# EAGLE board induction heater (EAGLE 9.6.2)
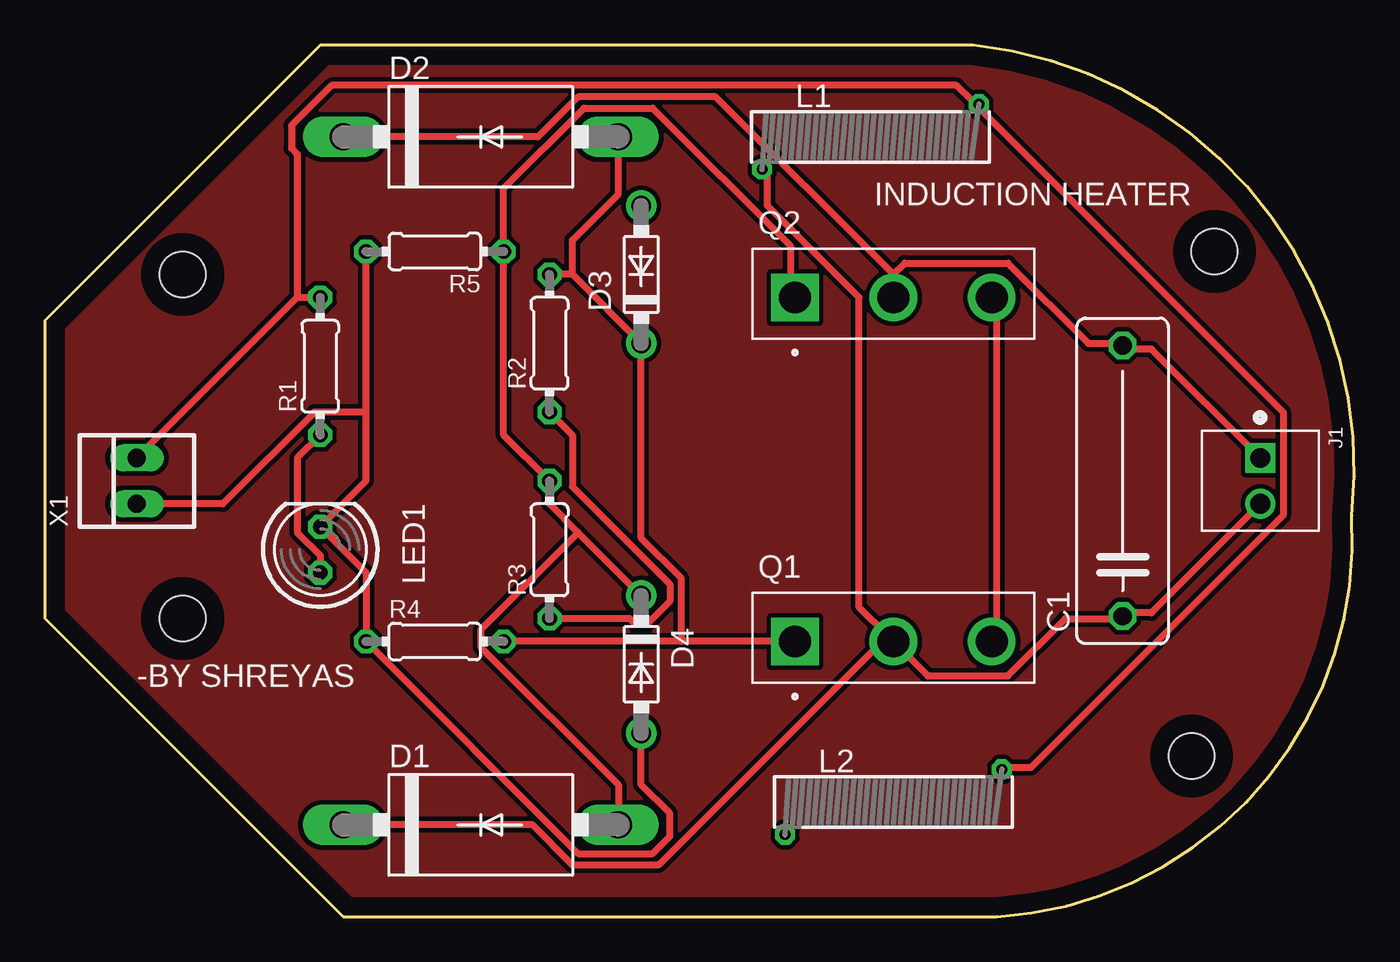
[diagram p0: board, top side]
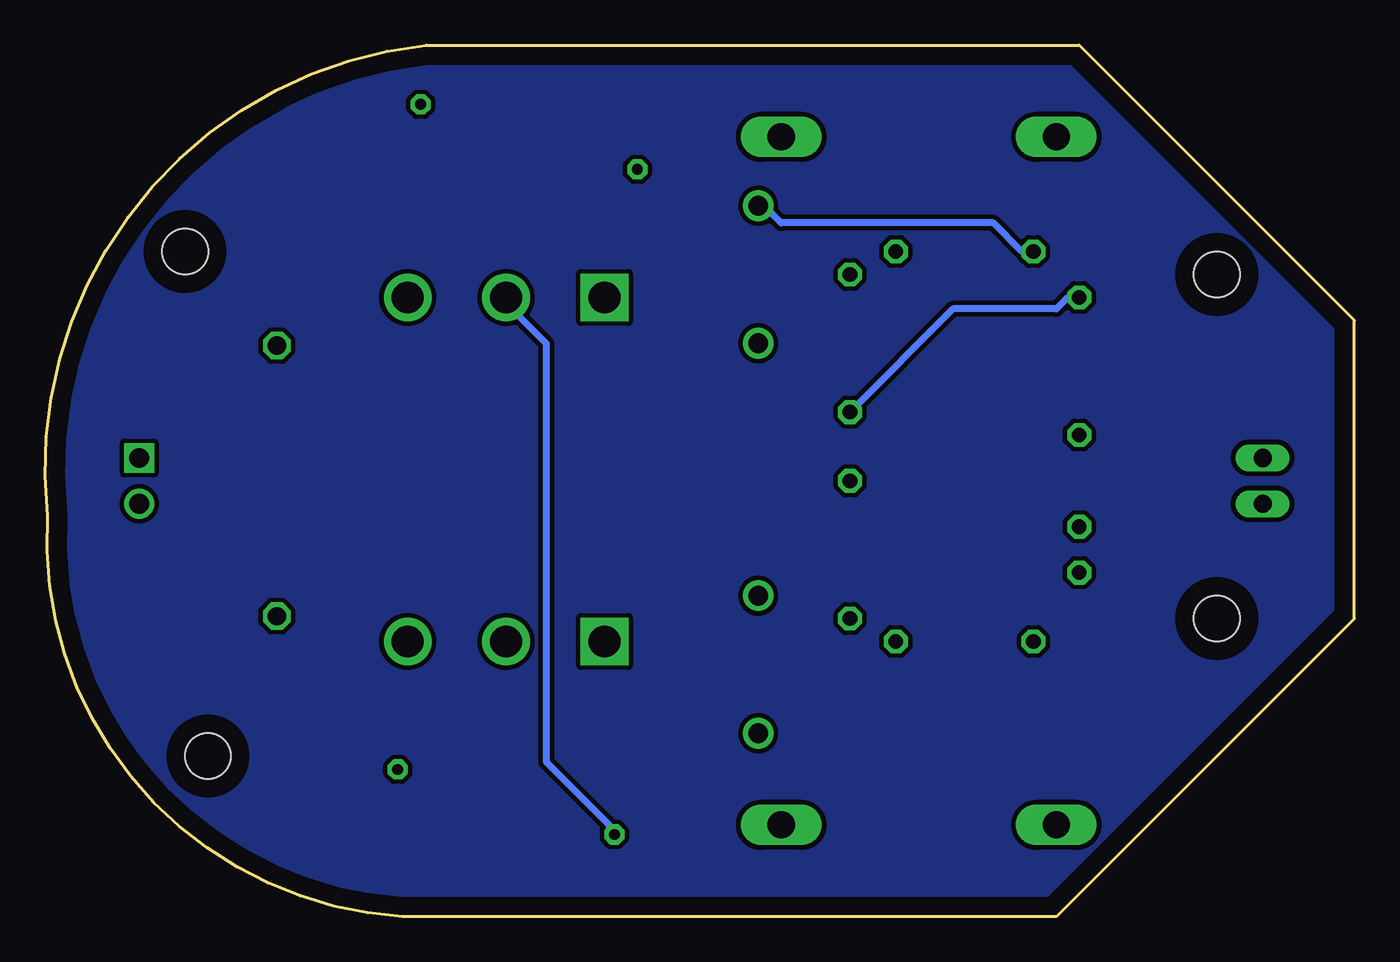
[diagram p1: board, bottom side, seen from below]

Size 72.52 x 48.26 mm. Coordinates in mm from the lower left corner, seen from the top.
Outline: 0,16.51 0,33.02 15.24,48.26 51.41,48.26 arc-90 72.39,22.2 arc-90 52.73,0 16.51,0 0,16.51
Copper layers (1*16): Top 0.035mm / dielectric 1.5mm / Bottom 0.035mm
Design rules "default": minimum track width 6mil, minimum drill 0.35mm, track to track 6mil, track to pad 6mil, pad to pad 6mil, via to via 6mil, smd to smd 6mil, copper to edge 40mil, drill to drill 6mil, minimum pad ring 10mil, minimum via ring 8mil, stop-mask expansion 4mil, vias tented up to drill 0mil, thermal gap 10mil
Net classes: 0 default: width 0.381 mm, drill 0.508 mm, clearance 0.254 mm
Holes 2.54 mm at 7.62,35.56 63.5,8.89 7.62,16.51 64.77,36.83

## Footprints (pad centres in the part's own frame; a part is rotated, then mirrored left to right if it is on the bottom)
C150-054X183 = drill 1.016 octagon: 1 -7.493,0; 2 7.493,0
DO201-15 = drill 1.499 long: A 7.62,0; C -7.62,0
DO41-7.6 = drill 1.1 pad 1.7: A 3.81,0; C -3.81,0
CONN_282834-2 = drill 1.1 square: 1 -1.27,0 | drill 1.1: 2 1.27,0
Z15/4 = drill 0.6 octagon: 1 -6,-1.8; 2 6,1.8
LED5MM = drill 0.813 octagon: A -1.27,0; K 1.27,0
TO545P1560X500X2460-3 = drill 1.76 pad 2.64 square: 1 -5.45,0 | drill 1.76 pad 2.64: 2 0,0; 3 5.45,0
0204/7 = drill 0.813 octagon: 1 -3.81,0; 2 3.81,0
22-23-2021 = drill 1 long: 1 -1.27,0; 2 1.27,0

## Placement (x,y rotation side)
C1  33uF  [C150-054X183]  59.69,24.13 90 top
D1  1N5400  [DO201-15]  24.13,5.08 0 top
D2  1N5400  [DO201-15]  24.13,43.18 0 top
D3  1N4742DO41-7.6  [DO41-7.6]  33.02,35.56 90 top
D4  1N4742DO41-7.6  [DO41-7.6]  33.02,13.97 270 top
J1  282834-2  [CONN_282834-2]  67.31,24.13 270 top
L1  [Z15/4]  45.72,43.18 0 top
L2  [Z15/4]  46.99,6.35 0 top
LED1  [LED5MM]  15.24,20.32 90 top
Q1  IRFP260N  [TO545P1560X500X2460-3]  46.99,15.24 0 top
Q2  IRFP260N  [TO545P1560X500X2460-3]  46.99,34.29 0 top
R1  4.7K  [0204/7]  15.24,30.48 90 top
R2  470ohm  [0204/7]  27.94,31.75 90 top
R3  470ohm  [0204/7]  27.94,20.32 90 top
R4  10K  [0204/7]  21.59,15.24 0 top
R5  10K  [0204/7]  21.59,36.83 180 top
X1  22-23-2021  [22-23-2021]  5.08,24.13 90 top

## Library data of the parts
C1 = rcl; SPICEPREFIX: C
D1 D2 = diode
D3 D4 = 1N4742; AVAILABILITY: Warning; DESCRIPTION: Diode Zener Single 12V 10% 1000mW 2-Pin DO-41; MF: EIC; MP: 1N4742; PACKAGE: DO-41 EIC; PRICE: None
J1 = 282834-2; AVAILABILITY: Good; CENTERLINE_PITCH: 2.54 mm[.1 in]; COMMENT: 282834-2; DESCRIPTION: Wire-To-Board Terminal Block, 2, 150 V, 10 A, 30 Awg, 16 Awg, 1.4 Mm; EU_ROHS_COMPLIANCE: Compliant with Exemptions; MF: TE Connectivity; MP: 282834-2; NUMBER_OF_POSITIONS: 2; PACKAGE: None; PRICE: None; PURCHASE-URL: https://pricing.snapeda.com/search/part/282834-2/?ref=eda
L1 L2 = inductor-neosid; OC_FARNELL: unknown; OC_NEWARK: unknown
LED1 = led
Q1 Q2 = IRFP260N; AVAILABILITY: Unavailable; DESCRIPTION: N-Channel 200V 50A (Tc) 300W (Tc) Through Hole TO-247AC; MF: Infineon Technologies; MP: IRFP260N; PACKAGE: TO-247-3 Infineon Technologies; PRICE: None
R1-R5 = rcl; SPICEPREFIX: R
X1 = con-molex; MF: MOLEX; MPN: 22-23-2021; OC_FARNELL: 1462926; OC_NEWARK: 25C3832

## Nets
N$1: LED1.A R1.1
N$2: D2.A D3.C Q1.1 R2.2 R4.2
N$3: D3.A D4.A LED1.K R4.1 R5.2 X1.1
N$4: Q1.3 Q2.3
N$6: D1.A D4.C Q2.1 R3.2 R5.1
N$7: C1.2 D2.C J1.1 L2.1 Q2.2
N$8: L1.2 L2.2 R1.2 R2.1 R3.1 X1.2
N$10: C1.1 D1.C J1.2 L1.1 Q1.2

## Tracks (layer width: path | path; a pad name or v marks a point on that pad's centre or on a via)
GND
  pour Bottom: 0,33.02 0,16.51 16.51,0 52.73,0 arc90 72.39,22.2 arc90 51.41,48.26 15.24,48.26
N$1
  Top 0.381: LED1.A 15.24,20 13.97,21.27 13.97,25.4 R1.1
N$2
  Top 0.381: 29.21,35.56 R2.2 | 29.21,35.56 D3.C 33.02,20.95 35.24,18.73 35.24,15.24 | D2.A 31.75,40.01 29.21,37.47 29.21,35.56 | Q1.1 35.24,15.24 | 35.24,15.24 R4.2
N$3
  Top 0.381: 17.78,27.94 17.78,24.13 LED1.K 17.78,19.05 R4.1 29.53,3.49 33.66,3.49 34.61,4.45 34.61,5.71 33.02,7.3 D4.A | 17.78,27.94 R5.2 | X1.1 9.84,22.86 14.92,27.94 17.78,27.94
  Bottom 0.381: D3.A 32.7,39.37 31.75,38.42 20,38.42 18.41,36.83 R5.2
N$4
  Top 0.381: Q1.3 52.7,15.24 52.7,34.29 Q2.3
N$6
  Top 0.381: D4.C 29.53,21.27 | 29.53,21.27 27.94,22.86 R3.2 25.4,26.67 R5.1 25.4,40.32 29.84,44.77 33.66,44.77 41.27,37.15 41.27,34.29 Q2.1 | D1.A 31.75,7.3 24.13,14.92 24.13,15.88 29.53,21.27
N$7
  Top 0.381: J1.1 61.28,31.43 59.69,31.43 C1.2 59.69,31.75 57.78,31.75 53.34,36.2 47.62,36.2 46.99,35.56 | D2.C 27.3,43.18 29.53,45.4 37.15,45.4 46.99,35.56 | 46.99,35.56 Q2.2
  Bottom 0.381: Q2.2 46.99,33.97 44.77,31.75 44.77,8.57 41.27,5.08 41.27,4.76 L2.1
N$8
  Top 0.381: R3.1 32.38,16.51 32.7,16.19 33.34,16.19 34.61,17.46 34.61,18.41 29.21,23.81 29.21,26.67 R2.1 | 13.97,34.29 R1.2 | X1.2 13.97,34.29 | L2.2 53.02,8.26 54.61,8.26 68.58,22.23 68.58,27.94 51.75,44.77 L1.2 51.44,45.09 50.48,46.04 15.88,46.04 13.65,43.81 13.65,42.55 13.97,42.23 13.97,34.29
  Bottom 0.381: R2.1 22.23,33.66 16.51,33.66 15.88,34.29 R1.2
N$10
  Top 0.381: J1.2 61.28,16.83 59.69,16.83 C1.1 59.69,16.51 56.52,16.51 53.34,13.34 48.9,13.34 Q1.2 46.67,15.56 | 46.67,15.56 45.09,17.14 45.09,34.29 40.01,39.37 40.01,41.27 L1.1 | D1.C 26.99,5.08 29.21,2.86 33.97,2.86 46.67,15.56
VCC
  pour Top: 16.51,0 0,16.51 0,33.02 15.24,48.26 51.41,48.26 arc-90 72.39,22.2 arc-90 52.73,0

## Text on the board
tPlace: INDUCTION HEATER | -BY SHREYAS